# Altium PCB BLDC_DRV.PcbDoc
Units mil, origin at the board's own origin, x right, y up, seen from the top; angles counter-clockwise.
Board outline 4151.26 x 2211.23 mil, 2 copper layers (TOP, BOTTOM), stack 21 mil thick; 147 components, 93 nets, 524 pads, 184 vias.
Unrouted connection lines stored in the file: 67.
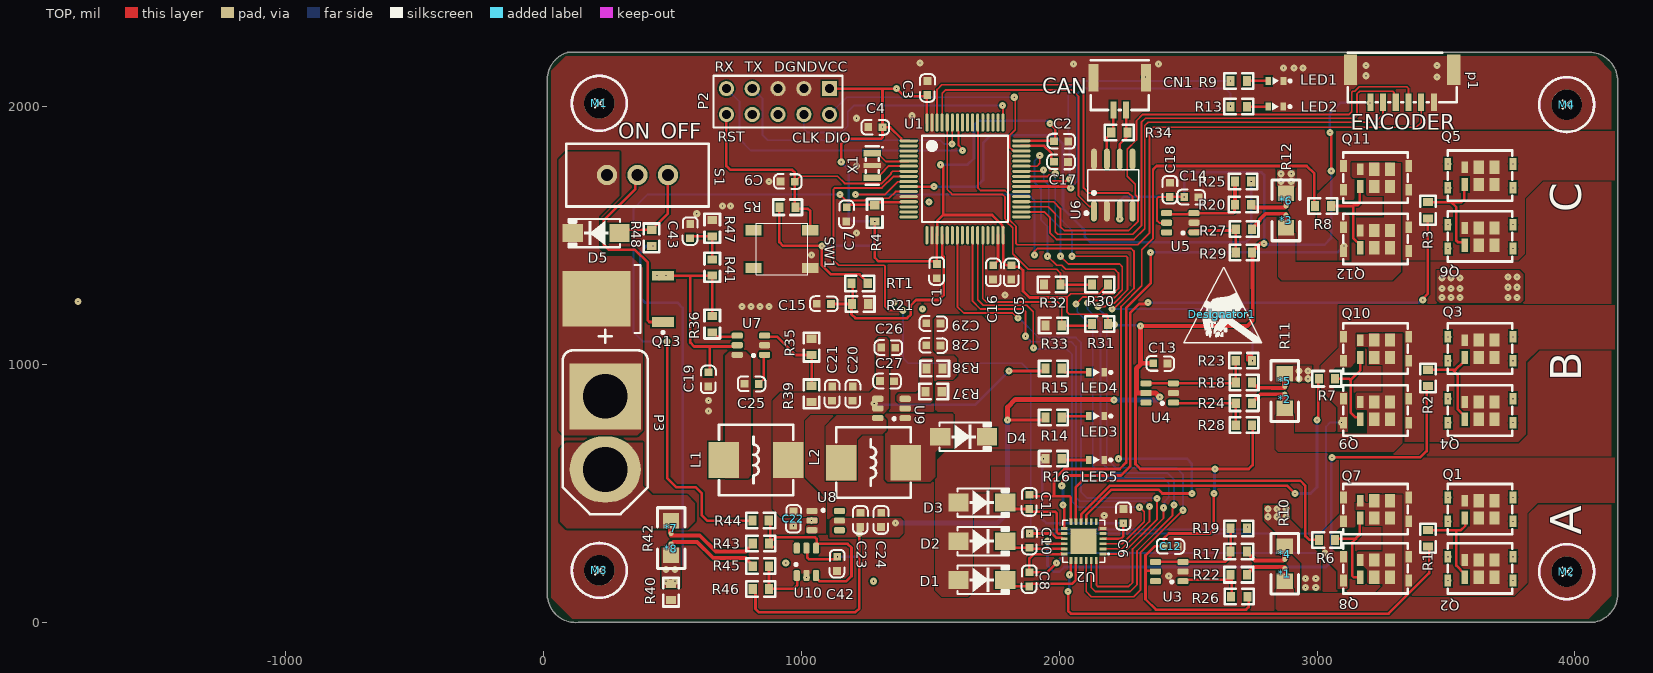
[diagram p0: TOP view]
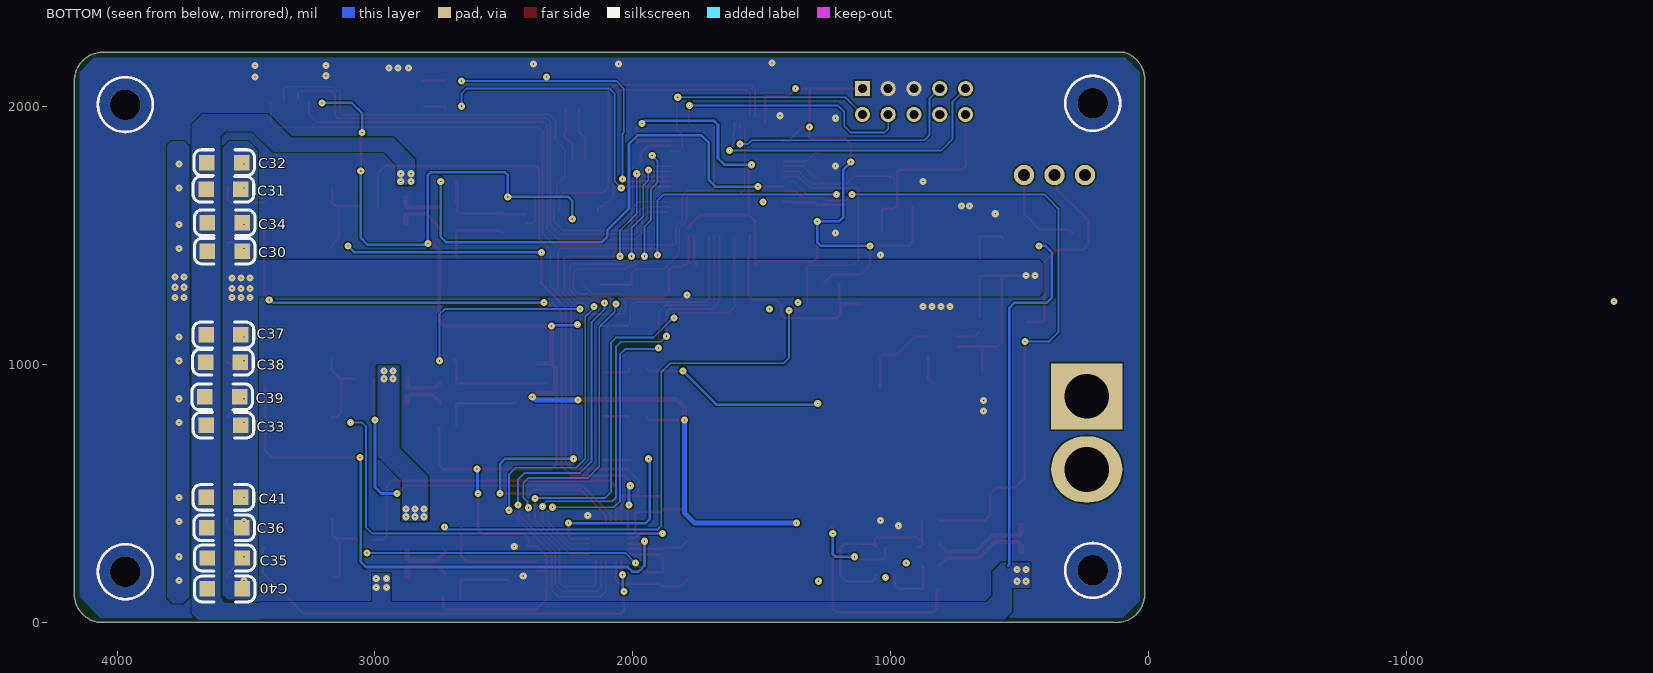
[diagram p1: BOTTOM view, seen from below]

## Layer stack, top to bottom
Top Solder: solder mask 0.4, Solder Resist, Dk 3.5
TOP: signal copper 1.4
Dielectric 2: prepreg 2.8, Composite dielectric, Dk 4.56
Dielectric 1: prepreg 12.6, Composite dielectric, Dk 4.56
Dielectric 3: prepreg 2.8, Composite dielectric, Dk 4.56
BOTTOM: signal copper 1.4
Bottom Solder: solder mask 0.4, Solder Resist, Dk 3.5

## Board outline
16.38,93.48 cw(c20,96.95) 14.98,96.95 14.98,2094.79 cw(c125.46,2104.06) 92.71,2209.98 cw(c94.88,2205.46) 94.88,2210.47 4045.72,2210.47 cw(c4055,2100) 4164.8,2115.3 cw(c4159.83,2114.61) 4164.85,2114.61 cw(c4159.83,2114.61) 4164.7,2113.39 cw(c4160.46,2110.71) 4165.47,2110.71 4165.47,119.28 cw(c4055,110) 4165.86,110 cw(c4055,110) 4078.88,1.74 cw(c4075.07,5) 4075.07,-0.01 135.21,-0.01 cw(c125.94,110.46)

## Design rules (kind name [scope] priority, off if disabled: settings)
Clearance [All] p1: gap=6 ignorepadtopadclearanceinfootprint=FALSE except(0: Arc-Hole Track-Hole SMDPad-SMDPad SMDPad-Hole THPad-Hole Via-Hole Fill-Hole Poly-Hole Region-Hole Text-Hole)
DiffPairsRouting DiffPair_DiffPairsRouting [InDifferentialPair ('NewDifferentialPair5')] p1: maxlimit=10 minlimit=10 mostfreqgap=10 toplayer_minwidth=7 toplayer_maxwidth=15 toplayer_prefwidth=15 bottomlayer_minwidth=7 bottomlayer_maxwidth=15 bottomlayer_prefwidth=15 maxuncoupledlength=500
DiffPairsRouting [All] p2: maxlimit=10 minlimit=10 mostfreqgap=10 toplayer_minwidth=15 toplayer_maxwidth=15 toplayer_prefwidth=15 bottomlayer_minwidth=15 bottomlayer_maxwidth=15 bottomlayer_prefwidth=15 maxuncoupledlength=500
MatchedLengths DiffPair_MatchedLengths [InDifferentialPair ('NewDifferentialPair5')] p1: tolerance=1000 checknetsindiffpair=FALSE checkdiffpairvsdiffpair=TRUE checkxsignals=TRUE checkothers=TRUE
MatchedLengths DiffPair_MatchedLengths_1 [InDifferentialPair ('NewDifferentialPair1')] p2: tolerance=1000 checknetsindiffpair=FALSE checkdiffpairvsdiffpair=TRUE checkxsignals=TRUE checkothers=TRUE
PlaneConnect PlaneConnect_1 [All] p1: planeconnectstyle=Relief reliefexpansion=20 reliefentries=4 reliefconductorwidth=10 reliefairgap=10
PlaneConnect [All] p2: planeconnectstyle=Relief reliefexpansion=20 reliefentries=4 reliefconductorwidth=10 reliefairgap=10
PolygonConnect [All] p1: connectstyle=Direct reliefconductorwidth=10 reliefentries=4 polygonreliefangle="90 Angle" airgapwidth=10
RoomDefinition BLDC_DRV [InComponentClass('BLDC_DRV')] p1: confinementstyle=ConfineIn formatcopy=TRUE lockcomponents=FALSE outline -1405,-1950 -560,-1950 -560,-1255 -1405,-1255
RoutingVias [All] p1: holewidth=12 width=24 viastyle="Through Hole" minholewidth=10 minwidth=20 maxholewidth=20 maxwidth=40
SolderMaskExpansion [All] p1: expansion=4 istentingtop=FALSE
Width [All] p1: maxlimit=10 minlimit=7 preferedwidth=10 minimp=50.000000 maximp=50.000000 favimp=50.000000
28 further rules are at their usual default settings.

## Components (designator, comment, footprint, x,y, rotation, side; value= is the part's Value field where it differs from the comment)
*1 "Com" Network_com 2875,209.37 r270 top
*2 "Com" Network_com 2875,885 r270 top
*3 "Com" Network_com 2880,1579.37 r270 top
*4 "Com" Network_com 2875,245 r90 top
*5 "Com" Network_com 2875,915.63 r90 top
*6 "Com" Network_com 2880,1615 r90 top
*7 "Com" Network_com 495,384.37 r270 top
*8 "Com" Network_com 495,265.63 r90 top
C1 "100nF" 0603C 1526.35,1390.21 r270 top
C2 "100nF" 0603C 2035.21,1864.65 r180 top
C3 "100nF" 0603C 1490.35,2100.21 r270 top
C4 "100nF" 0603C 1259.79,1921.35 r0 top
C5 "100nF" 0603C 1813.65,1329.79 r90 top
C6 "10uF 16V" 0603C 2250,440 r270 top
C7 "100nF" 0603C 1174.65,1554.79 r90 top
C8 "2.2uF 16V" 0603C 1885,195 r270 top
C9 "100nF" 0603C 975.21,1708.65 r180 top
C10 "2.2uF 16V" 0603C 1886.35,345.21 r270 top
C11 "2.2uF 16V" 0603C 1885,495 r270 top
C12 "100nf 6.3v" 0603C 2404.79,296.35 r0 top
C13 "100nf 6.3v" 0603C 2364.79,1005.35 r0 top
C14 "100nf 6.3v" 0603C 2484.79,1650.35 r0 top
C15 "2.2uf 6.3V" 0603C 1115.21,1234.65 r180 top
C16 "2.2uF" 0603C 1743.65,1329.79 r90 top
C17 "2.2uF" 0603C 2035,1785 r180 top
C18 "100nf 6.3v" 0603C 2430.35,1705.21 r270 top
C19 "2.2uf 100V" 0603C 638.65,914.79 r90 top
C20 "4.7uf 16V" 0603C 1198.65,859.79 r90 top
C21 "10uF 16V" 0603C 1118.65,859.79 r90 top
C22 "1uf 6.3v" 0603C 968.65,374.79 r90 top
C23 "1uf 6.3v" 0603C 1230.35,425.21 r270 top
C24 "100nf 6.3v" 0603C 1310.35,425.21 r270 top
C25 "100nf 50V" 0603C 779.79,926.35 r0 top
C26 "10uF/50V" 0603C 1365.21,1064.65 r180 top
C27 "100nf 16V" 0603C 1360.21,934.65 r180 top
C28 "10uF/50V" 0603C 1484.79,1075.35 r0 top
C29 "100nf 16V" 0603C 1484.79,1160.35 r0 top
C30 "4.7uF/50V" 1206C 3650,1440 r180 bottom
C31 "4.7uF/50V" 1206C 3655,1680 r180 bottom
C32 "4.7uF/50V" 1206C 3652.07,1783.18 r180 bottom
C33 "4.7uF/50V" 1206C 3655,765 r180 bottom
C34 "4.7uF/50V" 1206C 3650,1550 r180 bottom
C35 "4.7uF/50V" 1206C 3650,250 r180 bottom
C36 "4.7uF/50V" 1206C 3652.07,367.18 r180 bottom
C37 "4.7uF/50V" 1206C 3655,1115 r180 bottom
C38 "4.7uF/50V" 1206C 3657.07,1009.18 r180 bottom
C39 "4.7uF/50V" 1206C 3660,875 r180 bottom
C40 "4.7uF/50V" 1206C 3650,130 r180 bottom
C41 "4.7uF/50V" 1206C 3655,485 r180 bottom
C42 "100nf 6.3v" 0603C 1140.35,255.21 r270 top
C43 "100nf 6.3v" 0603C 570.35,1545.21 r270 top
CN1 "GH1.25-2P" GH1.25-WT-2P 2235,2050 r180 top
D1 "1N5819WS" SMA-L[DO-214AC] 1700,165 r0 top
D2 "1N5819WS" SMA-L[DO-214AC] 1700,315 r0 top
D3 "1N5819WS" SMA-L[DO-214AC] 1700,465 r0 top
D4 "1N5819WS" SMA-L[DO-214AC] 1630,720 r0 top
D5 "BZT52C16" SMA-L[DO-214AC] 204.45,1510 r180 top
Designator1 "Comment" ICO1 2630,1195 r0 top
L1 "4.7uH 3A" 0630L 705,630 r0 top
L2 "10UH" 0630L 1160,620 r0 top
LED1 "LED" LEDC1608(0603)-L 2840.47,2100 r180 top
LED2 "LED" LEDC1608(0603)-L 2840,2000 r180 top
LED3 "LED" LEDC1608(0603)-L 2145,800 r180 top
LED4 "LED" LEDC1608(0603)-L 2145,970 r180 top
LED5 "LED" LEDC1608(0603)-L 2145,630 r180 top
M1 "MountHole" M3-MountHole 216.85,2013.15 r0 top
M2 "MountHole" M3-MountHole 3968.15,196.85 r0 top
M3 "MountHole" M3-MountHole 216.85,201.85 r0 top
M4 "MountHole" M3-MountHole 3968.15,2008.15 r180 top
p1 "GH1.25-6p" GH1.25-WT-6P 3330,2080 r180 top
P2 "Header-D-F 2x5P" "Pin HDR2X5" 1110,2070 r180 top
P3 "XT60PB-M" XT60-M 240,735 r270 top
Q1 "IRF7480MTRPBF" TRS-SMD 3572.6,471.94 r0 top
Q2 "IRF7480MTRPBF" TRS-SMD 3572.6,242.21 r0 top
Q3 "IRF7480MTRPBF" TRS-SMD 3572.6,1094.73 r0 top
Q4 "IRF7480MTRPBF" TRS-SMD 3572.6,854.73 r0 top
Q5 "IRF7480MTRPBF" TRS-SMD 3572.6,1765 r0 top
Q6 "IRF7480MTRPBF" TRS-SMD 3572.6,1529.73 r0 top
Q7 "IRF7480MTRPBF" TRS-SMD 3167.6,471.94 r0 top
Q8 "IRF7480MTRPBF" TRS-SMD 3167.6,242.21 r0 top
Q9 "IRF7480MTRPBF" TRS-SMD 3167.6,854.73 r0 top
Q10 "IRF7480MTRPBF" TRS-SMD 3167.6,1094.73 r0 top
Q11 "IRF7480MTRPBF" TRS-SMD 3167.6,1757.21 r0 top
Q12 "IRF7480MTRPBF" TRS-SMD 3167.6,1520 r0 top
Q13 "HY19P03" TO-252AA 335,1255 r180 top
R1 "2.2R" 0603R 3430,295 r90 top
R2 "2.2R" 0603R 3430,917.01 r90 top
R3 "2.2R" 0603R 3430,1567.01 r90 top
R4 "0R" 0603R 1285,1555 r90 top
R5 "10K" 0603R 977.99,1610 r180 top
R6 "2.2R" 0603R 3007.01,320 r0 top
R7 "2.2R" 0603R 3007.01,945 r0 top
R8 "2.2R" 0603R 2992.01,1615 r0 top
R9 "1k" 0603R 2665,2100 r0 top
R10 "1mR" 1206R 2875,295 r270 top
R11 "1mR" 1206R 2875,965 r270 top
R12 "1mR" 1206R 2880,1665 r270 top
R13 "1k" 0603R 2665,2000 r0 top
R14 "10K" 0603R 1947.01,795 r0 top
R15 "10K" 0603R 1947.01,985 r0 top
R16 "10K" 0603R 1947.01,635 r0 top
R17 "1K" 0603R 2727.99,275 r180 top
R18 "1K" 0603R 2747.99,930 r180 top
R19 "30K" 0603R 2665,365 r0 top
R20 "1K" 0603R 2745,1620 r180 top
R21 "3.3k" 0603R 1197.01,1235 r0 top
R22 "510R" 0603R 2727.99,185 r180 top
R23 "30K" 0603R 2685,1015 r0 top
R24 "510R" 0603R 2747.99,850 r180 top
R25 "30K" 0603R 2682.01,1710 r0 top
R26 "30K" 0603R 2730,100 r180 top
R27 "510R" 0603R 2747.99,1525 r180 top
R28 "30K" 0603R 2747.99,765 r180 top
R29 "30K" 0603R 2747.99,1435 r180 top
R30 "1.5K" 0603R 2127.01,1310 r0 top
R31 "0R" 0603R 2127.01,1157.56 r0 top
R32 "0R" 0603R 1942.01,1310 r0 top
R33 "0R" 0603R 1947.01,1151.25 r0 top
R34 "120R" 0603R 2202.01,1900 r0 top
R35 "1K" 0603R 1040,1037.01 r90 top
R36 "100K" 0603R 655,1187.99 r270 top
R37 "100K" 0603R 1482.01,895 r0 top
R38 "5.1K" 0603R 1547.99,985 r180 top
R39 "5.36K" 0603R 1040,855 r90 top
R40 "0R" 0603R 495,87.01 r90 top
R41 "18k" 0603R 655,1407.99 r270 top
R42 "1mR" 1206R 495,260 r90 top
R43 "1K" 0603R 812.01,306.67 r0 top
R44 "30K" 0603R 874.01,395 r180 top
R45 "510R" 0603R 812.01,218.33 r0 top
R46 "30K" 0603R 812.01,130 r0 top
R47 "1k" 0603R 655,1560 r270 top
R48 "10K" 0603R 420,1460 r90 top
RT1 "33K" 0603R 1257.99,1315 r180 top
S1 "SS-12D10" SS-12D10 483.11,1735 r180 top
SW1 "TS-1187A-B-A-B" SMD-4X4X1.5 1034.76,1372.44 r180 top
U1 "STM32F405RGT6" LQFP_64 1635,1720 r0 top
U2 "FD6288Q_C328453" QFN-24 2170.1,265.79 r90 top
U3 "LMV321DBV" SOT-23-6_L2.9-W1.6-P0.95-LS2.8-BR 2426.85,197.4 r0 top
U4 "LMV321DBV" SOT-23-6_L2.9-W1.6-P0.95-LS2.8-BR 2390,890 r0 top
U5 "LMV321DBV" SOT-23-6_L2.9-W1.6-P0.95-LS2.8-BR 2470,1550 r0 top
U6 "MAX3051EKA+T" SOIC-8 2135,1587.3 r0 top
U7 "JW5026" SOT-23-6_L2.9-W1.6-P0.95-LS2.8-BR 805,1075 r0 top
U8 "SPX3819M5-L-3-3/TR" SOT-23-6_L2.9-W1.6-P0.95-LS2.8-BR 1095,395 r180 top
U9 "MT3608" SOT-23-6_L2.9-W1.6-P0.95-LS2.8-BR 1350,830 r0 top
U10 "LMV321DBV" SOT-23-6_L2.9-W1.6-P0.95-LS2.8-BR 1020,235 r270 top
X1 "8MHz" XTAL-3213-3P 1275,1772.2 r270 top

## Footprints (in the part's own frame and the unit in brackets; to place one, negate y for a bottom-side part, rotate by r counter-clockwise, add the part's x,y. Pads: shape width x height; smd on the part's side, far side on the other; paste and mask are expansions set on the pad)
0603C [mil]
  rect 30x30 smd: 1(0.21,-0.35) 2(55.21,-1.35)
  silkscreen extent -26,-30 81,28, body extent -1,-16 62,16, height 12
0603R [mm]
  rect 0.8x0.965 smd: 1(0,0) 2(1.6,0)
  silkscreen extent -0.64,-0.76 2.21,0.76, body extent -0.04,-0.41 1.56,0.41, height 0.45
0630L [mm]
  rect 3x3.5 smd: 1(-0.127,0) 2(6.223,0)
  silkscreen extent -0.61,-3.48 6.71,3.48, body extent -0.55,-3.05 6.4,3.55, height 3.05
1206C [mil]
  rect 60x60 smd: 1(0,0) 2(135,0)
  silkscreen extent -50,-50 185,50, body extent 2,-31 128,31, height 39
1206R [mil]
  rect 60x62.99 smd: 1(0,0) 2(135,0)
  silkscreen extent -50,-54 185,53, body extent 7,-31 133,31, height 24
GH1.25-WT-2P [mm] "GH1.25 2P 卧贴插座"
  rect 0.6x1.7 smd: 1(0.625,1.6) 2(-0.625,1.6)
  rect 1x2.7 smd: 3(2.575,-1.6) 4(-2.575,-1.6)
  silkscreen extent -2.88,-3.3 2.87,1.6, body extent -2.87,-2.86 2.87,2, height 4.26
GH1.25-WT-6P [mm] "GH1.25 6P 卧贴插座"
  rect 0.6x1.7 smd: 1(3.124,1.6) 2(1.874,1.6) 3(0.625,1.6) 4(-0.625,1.6) 5(-1.875,1.6) 6(-3.124,1.6)
  rect 1.3x3 smd: 7(5.074,-1.6) 8(-5.074,-1.6)
  silkscreen extent -5.37,-3.3 5.37,1.6, body extent -5.37,-2.86 5.37,2, height 4.26
ICO1 [mil]
  silkscreen extent -147,-112 156,183
LEDC1608(0603)-L [mm] "LED,Chip;1.60mm L X 0.80mm W X 0.80mm H"
  rect 0.55x0.8 smd: A(0.75,0) C(-0.75,0)
  silkscreen extent -1.53,-0.38 0.33,0.38, body extent -0.8,-0.4 0.8,0.42, height 0.64
LQFP_64 [mm] "LQFP_64_N"
  oval 1.8x0.3 smd: 1(-5.55,3.75) 2(-5.55,3.25) 3(-5.55,2.75) 4(-5.55,2.25) 5(-5.55,1.75) 6(-5.55,1.25) 7(-5.55,0.75) 8(-5.55,0.25) 9(-5.55,-0.25) 10(-5.55,-0.75) 11(-5.55,-1.25) 12(-5.55,-1.75) 13(-5.55,-2.25) 14(-5.55,-2.75) 15(-5.55,-3.25) 16(-5.55,-3.75) 33(5.55,-3.75) 34(5.55,-3.25) 35(5.55,-2.75) 36(5.55,-2.25) 37(5.55,-1.75) 38(5.55,-1.25) 39(5.55,-0.75) 40(5.55,-0.25) 41(5.55,0.25) 42(5.55,0.75) 43(5.55,1.25) 44(5.55,1.75) 45(5.55,2.25) 46(5.55,2.75) 47(5.55,3.25) 48(5.55,3.75)
  oval 0.3x1.8 smd: 17(-3.75,-5.55) 18(-3.25,-5.55) 19(-2.75,-5.55) 20(-2.25,-5.55) 21(-1.75,-5.55) 22(-1.25,-5.55) 23(-0.75,-5.55) 24(-0.25,-5.55) 25(0.25,-5.55) 26(0.75,-5.55) 27(1.25,-5.55) 28(1.75,-5.55) 29(2.25,-5.55) 30(2.75,-5.55) 31(3.25,-5.55) 32(3.75,-5.55) 49(3.75,5.55) 50(3.25,5.55) 51(2.75,5.55) 52(2.25,5.55) 53(1.75,5.55) 54(1.25,5.55) 55(0.75,5.55) 56(0.25,5.55) 57(-0.25,5.55) 58(-0.75,5.55) 59(-1.25,5.55) 60(-1.75,5.55) 61(-2.25,5.55) 62(-2.75,5.55) 63(-3.25,5.55) 64(-3.75,5.55)
  silkscreen extent -4.25,-4.25 4.25,4.25, body extent -5.99,-5.99 5.98,5.98, height 1.6
M3-MountHole [mm] "M3-MountHole"
  round 3 hole 3 unplated mask+0: 1(0,0)
  Keep-Out Layer circle w0.254: c0,0 r2.7
  silkscreen extent -2.7,-2.7 2.7,2.7
Network_com [mil]
  round 19.68 smd paste+0 mask+2: 1(0,0) 2(39.37,0)
  TOP region: 0,9.84 39.37,9.84 39.37,-9.85 0,-9.85 0,9.84
"Pin HDR2X5" [mm] "Connector; Header; 5x2 Position"
  rect 1.5x1.5 hole 0.9: 1(0,0)
  round 1.5 hole 0.9: 2(0,2.54) 3(2.54,0) 4(2.54,2.54) 5(5.08,0) 6(5.08,2.54) 7(7.62,0) 8(7.62,2.54) 9(10.16,0) 10(10.16,2.54)
  silkscreen extent -1.27,-1.27 11.43,3.81, body extent -1.27,-1.27 11.43,3.81, height 7.58
QFN-24 [mm]
  rect 0.28x0.665 smd paste-100 mask+0.05: 1(0,0) 2(0.5,0) 3(1,0) 4(1.5,0) 5(2,0) 6(2.5,0) 13(2.5,3.815) 14(2,3.815) 15(1.5,3.815) 16(1,3.815) 17(0.5,3.815) 18(0,3.815)
  rect 0.665x0.28 smd paste-100 mask+0.05: 7(3.157,0.658) 8(3.157,1.157) 9(3.157,1.658) 10(3.157,2.157) 11(3.157,2.658) 12(3.157,3.157) 19(-0.658,3.157) 20(-0.658,2.658) 21(-0.658,2.157) 22(-0.658,1.658) 23(-0.658,1.157) 24(-0.658,0.658)
  rect 2.55x2.55 smd paste-100 mask+0.05: 25(1.25,1.908)
  silkscreen extent -0.83,-0.62 3.33,3.98, body extent -0.89,-0.13 3.3,3.94, height 1
SMA-L[DO-214AC] [mm]
  rect 2x1.75 smd: A(-2.3,0) K(2.3,0)
  silkscreen extent -2.37,-1.4 2.7,1.4, body extent -2.9,-1.46 2.91,1.46, height 2.3
SMD-4X4X1.5 [mm]
  rect 1.6x1 smd: 1(-0.006,-0.065) 2(5.594,-0.065) 3(-0.006,-3.765) 4(5.594,-3.765)
  silkscreen extent 0.26,-4.44 5.32,0.64, body extent -0.53,-4.57 5.87,0.63, height 2.38
SOIC-8 [mil]
  oval 23.1x80.5 smd: 1(0,7.7) 2(50,7.7) 3(100,7.7) 4(150,7.7) 5(150,210) 6(100,210) 7(50,210) 8(0,210)
  silkscreen extent -35,-6 174,169, body extent -21,-13 171,223, height 67
SOT-23-6_L2.9-W1.6-P0.95-LS2.8-BR [mm]
  rrect50% 1.1x0.6 smd mask+0.051: 1(1.35,-0.95) 2(1.35,0) 3(1.35,0.95) 4(-1.35,0.95) 5(-1.35,0) 6(-1.35,-0.95)
  silkscreen extent 0.13,-1.14 0.38,-0.89, body extent -1.42,-1.46 1.42,1.46, height 1.07
SS-12D10 [mm]
  round 2 hole 1.2: 1(0,0) 2(3,0) 3(6,0)
  silkscreen extent -4,-3.1 10,3.1, body extent -3.95,-3.15 10.05,3.05, height 9.65
TO-252AA [mm]
  rect 6.7x5.5 smd: 1(3.275,0)
  rect 2.2x0.95 smd: 2(-3.275,2.28) 3(-3.275,-2.28)
  silkscreen extent -3.4,-3.35 -0.47,3.43, body extent -3.77,-3.27 6.16,3.27, height 2.39
TRS-SMD [mm]
  rect 0.65x1.15 smd: 1(0,0) 7(-1.65,0.325) 8(-1.65,-2.025) 9(4.76,-2.025) 10(4.76,0.325)
  rect 1x1.3 smd: 2(1.38,0) 3(2.93,0) 4(2.93,-1.7) 5(1.38,-1.7)
  rect 0.65x1.3 smd: 6(0,-1.7)
  silkscreen extent -1.67,-3.3 4.68,1.65, body extent -1.65,-3.37 4.7,1.59, height 0.25
XT60-M [mm] "长：16mm，宽：8.2mm，高：16mm"
  rect 6.5x7 hole 4.4: 1(-3.6,0)
  oval 6.5x7 hole 4.4: 2(3.6,0)
  silkscreen extent -10.16,-4.19 8,4.19, body extent -7.75,-4.1 8.15,4.05, height 16.5
XTAL-3213-3P [mil]
  rect 25.6x66.9 smd mask+2: 1(-47.2,0) 3(47.2,0)
  rect 19.7x66.9 smd mask+2: 2(0,0)
  silkscreen extent -75,-26 75,40, body extent -63,-26 63,26, height 32

## Part data
*1 *2 *3 *4 *5 *6 *7 *8: "网络连接"
C1 C2 C3 C4 C5 C7 C8 C9 C10 C11 C12 C13 C14 C15 C16 C17 C18 C20 C21 C22 C23 C24 C25 C27 C29 C42 C43: library part cap, "0603", Revision=V1.0
C6 C19 C26 C28: library part cap_1, "0805", Revision=V1.0
C30 C31 C32 C33 C34 C35 C36 C37 C38 C39 C40 C41: library part cap_2, "1206", Revision=V1.0
CN1: "CONN-SMD_2P-P1.25_GH1.25-2P"
D1 D2 D3 D4: "SOD-323_L1.7-W1.3-LS2.6-RD", Revision=V1.0
D5: "SOD-123_L2.7-W1.6-LS3.7-RD", Revision=V1.0
L1 L2: library part Ind-Power, "IND-SMD_L4.0-W4.0", DCR=.5m, Price(RMB)=0.000, Published=8-Jun-2000, Publisher="Altium Limited", Revision="July-2002: Re-released for DXP Platform."
LED1 LED2 LED3 LED4 LED5: "0603", Price(RMB)=0.00, Published=8-Jun-2000, Publisher="Altium Limited", Revision="July-2002: Re-released for DXP Platform."
M1 M2 M3 M4: "M3固定孔"
p1: "CONN-SMD_2P-P1.25_GH1.25-6P"
P2: "2*5pin", Revision=V1.0
P3: "CONN-TH_XT60PB-M"
Q1 Q2 Q3 Q4 Q5 Q6 Q7 Q8 Q9 Q10 Q11 Q12: "TRS-SMD_IRF7480MTRPBF"
Q13: library part HY19P03D, "TO-252-2_L6.6-W6.1-P4.57-LS9.9-TL-CW"
R1 R2 R3 R4 R5 R6 R7 R8 R9 R13 R14 R15 R16 R17 R18 R19 R20 R21 R22 R23 R24 R25 R26 R27 R28 R29 R30 R31 R32 R33 R34 R35 R36 R37 R38 R39 R40 R41 R43 R44 R45 R46 R47 R48 RT1: library part Res, "0603", Power=1/8W, Tolerance=±1%, Revision=V1.0
R10 R11 R12 R42: library part Res_1, "1206", Power=1/8W, Tolerance=±1%, Revision=V1.0
SW1: "SW-SMD_4P-L5.1-W5.1-P3.70-LS6.5-TL_H1.5"
U1: "ARM Cortex-M4 32-bit MCU+FPU, 210 DMIPS, 1024 kB Flash, 192 kB Internal RAM, 51 I/Os, 64-pin LQFP, -40 to 85 degC, Tray", I/Os (High Current)=51, Manufacturer=STMicroelectronics, Operating Frequency(F) (Processor speed) (MHz)=168, Supplier Part Number 1=497-11767-ND, Supply Voltage(Vcc) max (V)=3.6, Supply Voltage(Vcc) min (V)=1.8, ComponentLink1Description="Manufacturer URL", ComponentLink1URL=http://www.st.com/web/en/home.html, ComponentLink2Description=Datasheet, ComponentLink2URL=http://www.st.com/st-web-ui/static/active/en/resource/technical/document/datasheet/DM00037051.pdf, ComponentLink3Description="Package Specification", ComponentLink3URL=http://www.st.com/st-web-ui/static/active/en/resource/technical/document/datasheet/DM00037051.pdf, Core="ARM Cortex-M4", D/A Converter=2x12-bit, DatasheetVersion="Rev. 4", FLASH Size (Prog) (kB)=1024, Internal RAM Size (kB)=192, Mounting Technology="Surface Mount", PackageDescription="64-Pin Low Profile Quad Flat Package, 10 x 10 mm Body, 0.5 mm Pitch", PackageReference=LQFP64, PackageVersion="Rev. 4, 06/2013", Packing=Tray, PartNumber=STM32F405RGT6, Supplier 1=Digi-Key, Supplier 2=Farnell, Supplier 3=Newark, Supplier 4=Mouser, Supplier Part Number 2=2064363, Supplier Part Number 3=73T2329, Supplier Part Number 4=511-STM32F405RGT6
U2: "QFN-24_L4.0-W4.0-P0.50-BL-EP2.6"
U3 U4 U5 U10: "SOT-23-5_L3.0-W1.5-P0.95-LS2.8-BL", Symbol=CH217K
U6: "SOIC-8_L4.9-W3.9-P1.27-LS6.0-BL"
U7 U9: "SOT-23-6_L2.9-W1.6-P0.95-LS2.8-BR", Symbol=CH217K
U8: "SOT-23-5_L3.0-W1.7-P0.95-LS2.8-BR", Symbol=CH217K
X1: "OSC-SMD_3P-L3.2-W1.3-P1.20"

## Via types
v1: diameter 27.56, hole 0, TOP to BOTTOM, 183 vias
v2: diameter 27.56, hole 3.94, TOP to BOTTOM, 1 vias

## Nets (pads, with @x,y where several pads share a name; then routed paths per layer and width w, separated by ;. In a path a pad name is that pad's centre, name@x,y a point inside that pad or via, vN(x,y) a via of type N, cw(c..) or ccw(c..) an arc to the next point about the centre after c; other vN are vias at no path point)
5V: C20.1 C21.1 C22.2 C26.2 C27.2 L1.2 R15.1 R39.1 U8.1 U8.3 U9.4 U9.5 | length 718.7
  TOP w10: v1(1805,975) 1936.26,975 1945,983.74 R15.1@1945,985
  BOTTOM w10: v1@1285,845 1675,845 v1(1805,975)
  other v1: 1283.13,849.8
12: C6.2 C28.2 C29.2 D1.A D2.A D3.A D4.K R16.1 R37.2 U2.4 | length 698.5
  TOP w10: U2.4 2239.84,324.84 ; 2235,320 2239.84,324.84 ; C6.2 2248.65,333.65 2239.84,324.84
  BOTTOM w10: v1(1940,635) 1935,630 1935,400 1950,385 v1(2250,385)
BOOT0: R30.1 R32.2 U1.60 | length 1091.4
  TOP w7: U1.60@1566.1,1918.9 1566.1,1678.9 1585,1660 1780,1660 1790,1650 1790,1565.51 1795.57,1559.94 1795.57,1554.43 1820,1530 1820,1430 1880,1370 1990,1370 2005,1355 R32.2
  TOP w10: R32.2 R30.1
BOOT1: R31.1 R33.2 U1.28 | length 753.7
  TOP w7: U1.28 1703.9,1256.1 1717,1243 1992,1243 2010,1225 2010,1160 R33.2@2020,1150
  TOP w10: R33.2@2020,1150 2119.45,1150 R31.1
CAN1_RX: U1.62 U6.4 | length 1330.7
  TOP w7: U1.62@1526.73,1956.73 1526.73,2066.73 1545,2085 2070,2085 2095,2060 2095,1685 2115,1665 2270,1665 2285,1650 U6.4
CAN1_TX: U1.61 U6.1 | length 1110.6
  TOP w7: U1.61@1546.42,1961.42 1546.42,2051.42 1560,2065 2050,2065 2075,2040 2075,1655 2117.05,1612.95 2127.56,1612.95 2135,1605.51 U6.1
CAN_H: CN1.1 R34.1 U6.7 | length 198
  TOP w10: U6.7 2185,1879.74 2200.26,1895 R34.1@2205,1895 ; R34.1@2205,1900 2210.4,1905.4 CN1.1
CAN_L: CN1.2 R34.2 U6.6 | length 194.4
  TOP w10: U6.6 2235,1855 R34.2@2265,1885 ; CN1.2 2259.6,1900.4 R34.2@2265,1895
CH1_PA8_INHA: U1.41 U2.22 | length 2768.8
  TOP w7: U1.41 1954.84,1729.84 1961.07,1736.07 1988.93,1736.07 v1@1990,1735 ; v1(2050,1420) 2260,1420 2265,1415 2265,1290 2213.28,1238.28 2191.06,1238.28 2177.78,1225 v1@2145,1225 ; U2.22 2104.84,120.16 2125,100 2290,100 2315,125 2315,270 v1(2480,435)
  BOTTOM w7: v1(1985,1740) 1985,1585 2050,1520 v1(2050,1420) ; v1@2145,1225 2185,1185 2185,635 2220,600 2455,600 2480,575 v1(2480,435)
  other v1: 2150,1225
CH1N_PA7_INLA: U1.23 U2.1 | length 2048.1
  TOP w7: U1.23 1605.47,1224.53 1630,1200 1820,1200 v1(1840,1180) v1@1842.13,1177.87 ; U2.1 2245.79,265.79 2380,400 v1(2380,480)
  BOTTOM w7: v1(1840,1180) 1845,1180 1920,1105 2065,1105 2085,1085 2085,505 2107,483 2377,483 v1(2380,480)
CH2_PA9_INHB: U1.42 U2.23 | length 2664.9
  TOP w7: U1.42 1928.96,1749.53 1934.44,1755 v1(1940,1755) ; v1(2005,1420) 2035,1390 2235,1390 2245,1380 2245,1290 2215,1260 2176.77,1260 2165.77,1249 2141.08,1249 2134.28,1242.2 2113.48,1242.2 v1(2110,1238.72) ; U2.23 2124.53,135.47 2140,120 2275,120 2302,147 2302,277 2440,415 2440,440.62 2441.07,441.69 2441.07,451.4 v1@2440,452.47
  BOTTOM w7: v1(1940,1755) 1940,1715 1960,1695 1960,1575 2005,1530 v1(2005,1420) ; v1(2110,1238.72) 2110,1215 2160,1165 2160,625 2205,580 2420,580 2445,555 v1(2445,455)
CH2N_PB0_INLB: U1.26 U2.2 | length 1949.5
  TOP w7: U1.26 1664.53,1245.47 1695,1215 1860,1215 1870,1205 v1(1870,1110) ; U2.2 2243.91,285.47 2350,391.57 v1(2350,450)
  BOTTOM w7: v1(1870,1110) 1891.72,1088.28 2046.72,1088.28 2065,1070 2065,485 2080,470 2335,470 v1@2350,455
CH3_PA10_INHC: U1.43 U2.24 | length 2724.9
  TOP w7: U1.43 1914.21,1769.21 1925,1780 v1@1925,1800.5 ; v1(1955,1420) 1990,1385 2010,1385 2025,1370 2215,1370 2230,1355 2230,1295 2210,1275 2173.38,1275 2160.38,1262 2092,1262 2070,1240 v1@2065,1240 ; U2.24 2145,239.11 2145,144.1 2149.1,140 2270,140 2285,155 2285,285 2405,405 v1(2405,445)
  BOTTOM w7: v1(1925,1810) 1905,1790 1905,1705 1930,1680 1930,1560 1955,1535 v1(1955,1420) ; v1@2070,1230 2068.93,1228.93 2068.93,1225.5 2070,1224.44 2070,1205 2130,1145 2130,605 2175,560 2405,560 2425,540 2425,485 2408.93,468.93 2408.93,448.93 v1(2405,445)
  other v1: 2065,1235
CH3N_PB1_INLC: U1.27 U2.3 | length 1888.7
  TOP w7: U1.27 1684.21,1250.79 1705,1230 1875,1230 1900,1205 v1(1900,1065) ; U2.3 2245.16,305.16 2330,390 2330,430 v1@2315,445
  BOTTOM w7: v1@1895.92,1069.08 1905,1060 2030,1060 2050,1040 2050,470 2073.34,446.66 v1(2311.14,446.66)
DCBUS: C19.2 C30.2 C31.2 C32.2 C33.2 C34.2 C35.2 C36.2 C37.2 C38.2 C39.2 C40.2 C41.2 Q1.7 Q1.8 Q1.9 Q1.10 Q2.7 Q2.8 Q2.9 Q2.10 Q3.7 Q3.8 Q3.9 Q3.10 Q4.7 Q4.8 Q4.9 Q4.10 Q5.7 Q5.8 Q5.9 Q5.10 Q6.7 Q6.8 Q6.9 Q6.10 Q13.3 R36.1 R41.2 U7.5 | length 898.5
  TOP w10: Q13.3@449.14,1331.06 462.84,1344.76 Q13.3 464,1344.7 Q13.3@475,1344.7 ; Q13.3@480,1344.7 570,1344.7 654.7,1344.7 R41.2 R36.1@655,1185 ; 570,1345 570,1085 585,1070 645,1070 ; C19.2@645,974.42 645,1070 ; U7.5@740,1070 645,1070
  other v1: 3507.64,162.48 3760,162.48 3507.64,255 3760,255 3507.64,392.21 3760,392.21 3507.64,484.73 3760,484.73 3507.64,775 3760,775 3507.64,867.52 3760,867.52 3507.64,1015 3760,1015 3507.64,1107.52 3760,1107.52 3485,1260 3520,1260 3555,1260 3740,1260 3775,1260 3485,1295 3520,1295 3555,1295 3740,1300 3775,1300 3485,1335 3520,1335 3555,1335 3740,1340 3775,1340 440,1345 475,1345 3507.64,1450 3760,1450 3507.64,1542.52 3760,1542.52 3507.64,1685.27 3760,1685.27 3507.64,1777.79 3760,1777.79
DGND: C1.2 C2.1 C3.1 C4.1 C5.1 C6.1 C7.1 C9.2 C12.2 C13.2 C14.2 C15.2 C16.1 C17.1 C18.1 C19.1 C20.2 C21.2 C22.1 C23.1 C24.1 C26.1 C27.1 C28.1 C29.1 C42.2 C43.1 CN1.3 CN1.4 LED1.C LED2.C LED3.C LED4.C LED5.C M1.1 M2.1 M3.1 M4.1 p1.6 p1.7 p1.8 P2.3 P2.5 R21.2 R32.1 R33.1 R35.2 R38.1 R40.1 R47.1 SW1.1 U1.12 U1.18 U1.63 U2.6 U3.2 U4.2 U5.2 U6.2 U6.8 U7.2 U8.2 U9.2 U10.2 X1.2
  other v1: 2425,180 2460,295 970,375 1040,395 2175,415 640,820 640,860 770,1225 805,1225 840,1225 875,1225 1790,1270 1040,1425 1215,1510 595,1585 695,1615 725,1615 875,1710 1215,1770 1215,1955 1430,1965 3465,2115 3190,2120 2870,2150 2910,2150 2945,2150 3190,2160 3465,2160 2055,2165 2385,2165 1460,2170
ENC_SPI2_CLK: p1.2 U1.34 | length 1950.2
  TOP w7: U1.34@1867.05,1592.05 1942.95,1592.05 1965,1570 1965,1510 1990,1485 2290,1485 2332.05,1527.05 2332.05,1927.05 2345,1940 3225,1940 3256.22,1971.22 p1.2
ENC_SPI2_CS: p1.5 U1.54 | length 2647.4
  TOP w7: U1.54@1685,1921.17 1685,1685 1695,1675 1790,1675 1808.57,1656.43 1808.57,1559.81 1833,1535.38 1833,1469.1 1837.1,1465 2305,1465 2350,1510 2350,1905 2365,1920 3385,1920 3403.81,1938.81 p1.5
ENC_SPI2_MISO: p1.3 U1.35 | length 2076.7
  TOP w7: U1.35 1958.27,1611.73 1985,1585 1985,1515 1995,1505 2285,1505 2319.05,1539.05 2319.05,1939.05 2335,1955 3145,1955 3155,1965 3155,2050 3165,2060 3294.07,2060 3298.17,2055.9 3298.17,2031.83 p1.3@3303.13,2026.87
ENC_SPI2_MOSI: p1.4 U1.36 | length 2173
  TOP w7: U1.36@1866.42,1631.42 1978.58,1631.42 2005,1605 2005,1535 2020,1520 2270,1520 2306.05,1556.05 2306.05,1647.33 2295,1658.38 2295,1700 2263.95,1731.05 2263.95,1834.72 2300,1870.77 2300,1945 2325,1970 3125,1970 3135,1980 3135,2055.9 3139.1,2060 3146.62,2060 3163.72,2077.1 3347.9,2077.1 3354.62,2070.38 p1.4
GHA: R1.1 U2.19 | length 1779.7
  TOP w10: v1(2035,120) 2035,45 2046,34 3277.51,34 3435,191.49 3435,285 R1.1@3430,290 ; v1@2040,175 2045.79,180.79 U2.19
  BOTTOM w10: v1(2035,120) 2040,125 v1(2040,185)
GHB: R2.1 U2.16 | length 2326.9
  TOP w10: v1(1955,315) 1964.84,305.16 U2.16 ; v1(3058.28,640) 3400,640 3425,665 3425,912.01 R2.1
  BOTTOM w10: v1(1955,315) 1955,220 1978.36,196.64 2001.64,196.64 2020,215 3034.73,215 3055,235.27 3055,636.72 v1(3058.28,640)
GHC: R3.1 U2.13 | length 2524.6
  TOP w10: v1(2010,530) 2012.85,532.85 2012.85,547.85 2035,570 2240,570 2275.5,605.5 2275.5,1200.5 2310,1235 v1@2345,1235 ; U2.13 2019.9,444.9 v1@2020,445 ; v1@3410,1255 3430,1275 R3.1
  BOTTOM w10: v1(2015,455) v1@2015,530 ; v1(2345,1240) 3395,1240 v1@3405,1250
  other v1: 3410,1250
GLA: R6.1 U2.11 | length 1296.9
  TOP w10: U2.11@2065,390 2065,525 2090,550 2935,550 2955,530 2955,335 2970,320 R6.1
GLB: R7.1 U2.10 | length 1428.1
  TOP w10: U2.10 2085,390.26 2085,418.56 2197.22,530.78 2884.22,530.78 v1(2915,500) ; v1(3000,785) 3000,789.75 3005,794.75 R7.1@3005,942.91
  BOTTOM w10: v1@2920,500 2975,500 3000,525 v1(3000,785)
GLC: R8.1 U2.9 | length 2835.3
  TOP w7: v1@2240,637.68 2240,1225 2320,1305 2320,1445 2364.5,1489.5 2364.5,1756.55
  TOP w10: U2.9 2104.84,415.77 2203.85,514.78 2385.26,514.78 2400.04,500 v1(2515,500) ; 2364.5,1756.55 2377.95,1770 2960,1770 2990,1740 R8.1@2990,1609.88
  BOTTOM w10: v1(2230,635) 2495,635 2515,615 v1(2515,500)
ISENS: R44.2 U1.11 | length 2700.5
  TOP w7: v1(1150,1660) 1173.28,1636.72 1246.72,1636.72 1255,1645 1340,1645 1365.79,1670.79 1409.21,1670.79 U1.11@1410,1670
  TOP w10: v1(480,1090) 480,560 515,525 590,525 615,500 615,415 635,395 R44.2
  BOTTOM w7: v1(480,1090) 385,1090 350,1125 350,1605 390,1645 405,1660 v1@1140,1660
ISENSA: R19.2 U1.8 | length 3175.3
  TOP w7: v1(1395,1210) 1340,1210 1325,1225 1325,1380.9 1320.9,1385 1145,1385 1125,1405 1125,1680 1129.88,1684.88 1312.95,1684.88 1357.91,1729.84 U1.8
  BOTTOM w7: v1(1395,1210) 1395,1025 1415,1005 1855,1005 1890,970 1890,375 1905,360 2725,360 v1@2730,365
  other v1: 2730,370
ISENSB: R23.2 U1.9 | length 2592.3
  TOP w7: v1(1210,1660) 1325,1660 1374.24,1709.24 1394.24,1709.24 U1.9@1395,1710 ; v1@1905,1430 1905,1440 1915,1450 2280,1450 2290,1440 2290,1295 2210,1215 v1(2205,1215) ; R23.2 2747.99,1037.5 2730.79,1037.5 2728.74,1035.45 2728.74,1015 v1(2750,1015)
  BOTTOM w7: 1225,1660 1575,1660 ; 1572.74,1660 1880,1660 1905,1635 v1(1905,1425) ; v1(2205,1215) 2730,1215 2750,1195 v1(2750,1015)
ISENSC: R25.2 U1.10 | length 2052.8
  TOP w10: U1.10 1416.73,1690.24 1514.76,1690.24 v1(1515,1690)
  BOTTOM w10: v1(1515,1690) 1680,1690 1705,1715 1705,1860 1735,1890 1980,1890 2015,1855 2015,1605 2100,1520 2100,1495 2120,1475 2725,1475 2745,1495 v1(2745,1710)
JTCK_SWCLK: P2.4 U1.49 | length 973.7
  TOP w7: v1@1775,2005 1782.64,1997.36 U1.49
  BOTTOM w7: P2.4@1005,1965 1010,1960 1010,1915 1025,1900 1155,1900 1180,1925 1180,1980 1205,2005 v1(1780,2005)
JTMS_SWDIO: P2.2 U1.46 | length 997.2
  TOP w7: v1@1825,2040 1830,2035 1830,1910 1808.57,1888.57 1808.57,1841.57 1817.6,1832.55 1818.4,1832.55 1822.67,1828.27 U1.46
  BOTTOM w7: P2.2@1121.31,1971.63 1121.31,1981.31 1176.53,2036.53 v1(1826.09,2036.53)
LED0: R13.1 U1.39 | length 1231.9
  TOP w10: U1.39@1855.47,1690.47 v1@2045.47,1690.47
  BOTTOM w7: v1(2045,1685) 2070,1710 2070,2050 2090,2070 2645,2070 2664.39,2050.61 v1(2664.39,2001.63) 2664.39,1995.61 v1@2665,1995
LED1: R9.1 U1.40 | length 1199.1
  TOP w10: U1.40 2025.19,1710.16 2035.03,1720 v1(2039.78,1720) ; R9.1@2654.25,2086 2655,2086.75 R9.1@2655,2100
  BOTTOM w7: v1(2039.78,1720) 2039.78,1895.39 2035,1900.17 2035,2070 2065,2100 v1(2665,2100)
Net*1_2: *1.2 Q7.1 Q7.2 Q7.3 Q7.4 Q7.5 Q8.1 Q8.2 Q8.3 Q8.4 Q8.5 R10.2
Net*2_2: *2.2 Q9.1 Q9.2 Q9.3 Q9.4 Q9.5 Q10.1 Q10.2 Q10.3 Q10.4 Q10.5 R11.2
Net*3_2: *3.2 Q11.1 Q11.2 Q11.3 Q11.4 Q11.5 Q12.1 Q12.2 Q12.3 Q12.4 Q12.5 R12.2
Net*7_1: *7.1 P3.2 R42.2
Net*7_2: *7.2 R43.1 | length 368.2
  TOP w15: *7.2 495,337.5 606.61,337.5 669.11,275 785,275 785,276.41 812.01,303.42 R43.1 ; R43.1@810,310 R43.1@810,311.92
Net*8_2: *8.2 R45.1 | length 370.4
  TOP w15: *8.2 496.27,305 503.77,312.5 596.25,312.5 658.75,250 785,250 785,248.59 R45.1@810,223.59 ; R45.1@810,215 R45.1@810,223.59 ; R45.1 812.01,221.58 R45.1@810,223.59
NetC7_2: C7.2 R4.2 U1.13 | length 236.6
  TOP w10: C7.2@1176,1620 R4.2@1272.01,1620 ; R4.2@1282.5,1620.5 R4.2 1295.75,1628.74 1303.59,1628.74 1304.85,1630 1385.06,1630 1386.48,1631.42 U1.13
NetC16_2: C16.2 U1.31 | length 119.8
  TOP w10: C16.2@1755,1385 1755,1395 1762.95,1402.95 U1.31
NetC17_2: C17.2 U1.47 | length 170.1
  TOP w10: U1.47 1942.05,1847.95 1969.79,1820.21 1969.79,1785.21 C17.2@1975,1780
NetC25_1: C25.1 L1.1 U7.6
NetC25_2: C25.2 U7.1 | length 113.3
  TOP w10: C25.2 855,945 U7.1@855,1030
NetD4_A: D4.A L2.2 U9.1
NetD5_A: D5.A R48.2 S1.1 | length 370.4
  TOP w10: D5.A 307.99,1522.99 R48.2 423.25,1522.99 434,1533.74 434,1536.99 483.11,1586.1 S1.1
NetD5_K: D5.K P3.1 Q13.1 S1.3
NetL2_1: L2.1 U9.6
NetLED1_A: LED1.A R9.2 | length 87
  TOP w10: R9.2 LED1.A LED1.A@2815,2100
NetLED2_A: LED2.A R13.2 | length 87.5
  TOP w10: R13.2@2725,1995 2730,2000 LED2.A
NetLED3_A: LED3.A R14.2 | length 102.5
  TOP w10: R14.2@2015,795 2020,800 LED3.A
NetLED4_A: LED4.A R15.2 | length 111.5
  TOP w10: R15.2@2015,985 2015,976.75 2021.75,970 LED4.A
NetLED5_A: LED5.A R16.2 | length 105.5
  TOP w10: R16.2@2010,630 LED5.A
NetQ1_6: Q1.6 Q2.6 R1.2 | length 370.3
  TOP w10: R1.2 3557.99,357.99 3575,375 Q1.6@3575,400 ; 3540,355 3540,220.66 3572.6,188.07 Q2.6
NetQ3_6: Q3.6 Q4.6 R2.2 | length 356.1
  TOP w10: R2.2 3525,980 ; Q4.6@3570,800 3570,803.18 3545,828.18 3545,960 3525,980 ; Q3.6@3575,1010 3567.6,1010 3537.6,980 3525,980
NetQ5_6: Q5.6 Q6.6 R3.2 | length 396.7
  TOP w10: R3.2 3520,1630 ; Q6.6@3570,1460 3570,1469.8 3564.8,1475 3545.86,1475 3540,1480.86 3540,1610 3520,1630 ; Q5.6@3570,1690 3570.86,1689.14 3570.86,1640.86 3560,1630 3520,1630
NetQ7_6: Q7.6 Q8.6 R6.2 | length 348.1
  TOP w10: R6.2 3075,325 3151.58,325 3136.58,310 3136.58,180.86 3142.43,175 Q8.6@3165,175 ; 3150,325 3165,340 3165,395 Q7.6@3170,400
NetQ9_6: Q9.6 Q10.6 R7.2 | length 340.8
  TOP w10: R7.2 3124.74,945 3130.6,939.14 3130.6,814.4 3150,795 3165,795 Q9.6@3170,790 ; 3129.87,939.87 3167.6,977.6 Q10.6
NetQ11_6: Q11.6 Q12.6 R8.2 | length 347.8
  TOP w10: R8.2 3060,1615 3140,1615 ; Q11.6@3165.86,1684.14 3165.86,1625.86 3157.99,1617.99 3140,1617.99 3140,1615 ; Q12.6@3170,1455 3170,1460.72 3140,1490.72 3140,1615
NetQ13_2: Q13.2 S1.2 | length 813.1
  TOP w10: S1.2 356.55,1726.55 356.55,1681.55 235,1560 235,1465 255,1445 355,1445 405,1395 405,1171.09 410.86,1165.24 Q13.2@468.94,1165.24
NetR17_2: R17.2 R19.1 U3.3 U3.4 | length 395.5
  TOP w10: U3.4@2370,235 2370.2,234.8 U3.4 U3.3 2643.05,234.8 2663.25,255 2665,255 ; R19.1@2662.99,365 R19.1@2667.99,370 ; R17.2@2665,260 2665,345
NetR18_2: R18.2 R23.1 U4.3 U4.4 | length 441.2
  TOP w10: U4.4 2442.6,927.4 U4.3@2445,925 ; U4.3 2677.4,927.4 R18.2@2680,930 ; R18.2 2685,1010 R23.1@2695,1020
NetR20_2: R20.2 R25.1 U5.3 U5.4 | length 655.7
  TOP w10: U5.4@2416.85,1582.4 U5.3@2523.15,1582.4 ; U5.3@2503.15,1582.4 U5.3@2523.15,1582.4 ; U5.3@2503.15,1587.4 U5.3@2517.6,1587.4 ; U5.3@2517.6,1582.4 U5.3@2523.15,1582.4 ; U5.3@2520,1585 U5.3@2517.6,1587.4 ; U5.3 2674.25,1587.4 ; 2680,1590 2680,1630 R25.1@2680,1697.01 ; 2680,1595 2680,1593.15 2674.25,1587.4 ; R25.1 2685,1707.01 2685,1697.01 R20.2@2685,1630 ; U5.3@2517.6,1587.4 2674.25,1587.4
NetR22_2: R22.2 R26.2 U3.1 | length 264.1
  TOP w10: U3.1 2485,165 2665,165 ; R22.2@2665,170 2670,165 R26.2@2670,95
NetR24_2: R24.2 R28.2 U4.1 | length 317.2
  TOP w10: U4.1@2455,855 2455,854.74 2459.74,850 R24.2 R28.2
NetR27_2: R27.2 R29.2 U5.1 | length 285.9
  TOP w10: U5.1@2503.15,1512.6 U5.1@2509.4,1518.85 ; U5.1@2505.73,1515.18 U5.1@2509.4,1518.85 ; R27.2@2682.4,1512.6 2685,1510 R29.2@2685,1420 ; R27.2 2680,1520 2525.66,1520 2524.52,1518.85 U5.1@2509.4,1518.85
NetR35_1: R35.1 R39.2 U7.3 | length 337.2
  TOP w10: U7.3@857.4,1107.4 907.6,1107.4 977.99,1037.01 R35.1 R39.2 R39.2@1040,915 ; U7.3@860,1110 U7.3@862.4,1112.4
NetR36_2: R36.2 U7.4 | length 95.2
  TOP w10: R36.2@660,1125 660,1123.25 675.85,1107.4 U7.4@746.85,1107.4
NetR37_1: R37.1 R38.2 U9.3
NetR43_2: R43.2 R44.1 U10.3 U10.4 | length 734.9
  TOP w10: R44.1@880,390 R43.2@880,314.91 ; R43.2@889,292.67 885.75,292.67 875,303.42 R43.2 875,309.91 R43.2@880,314.91 ; U10.4@1055,295 U10.4@1057.4,297.4 ; U10.3 1057.4,172.5 1069.9,160 1175,160 1195,180 1195,290 1180,305 U10.4@1065,305 ; U10.4@1060,295 1060,305 1060,324.14 1054.14,330 898.33,330 889,320.66 885.75,320.66 R43.2@880,314.91
NetR45_2: R45.2 R46.2 U10.1 | length 248.3
  TOP w10: R45.2@880,220 875,215 R46.2 970,130 985,145 U10.1@985,185
OS_8M_IN: U1.5 X1.1 | length 155.2
  TOP w7: X1.1 1295.65,1819.4 1327.49,1787.56 1382.22,1787.56 1382.65,1787.98 1415.58,1787.98 U1.5
OS_8M_OUT: U1.6 X1.3 | length 161.6
  TOP w7: X1.3 1295.65,1725 1322.48,1751.83 1322.48,1753.03 1340,1770.56 1382.22,1770.56 1382.65,1770.13 1415.58,1770.13 U1.6
PGND: *4.2 *5.2 *6.2 *8.1 C30.1 C31.1 C32.1 C33.1 C34.1 C35.1 C36.1 C37.1 C38.1 C39.1 C40.1 C41.1 R10.1 R11.1 R12.1 R40.2 R42.1 R48.1 | length 1419
  BOTTOM w10: v1(425,1460) 400,1460 375,1435 375,1260 395,1240 520,1240 540,1220 540,225 545,220
  other v1: 2955,135 2995,135 475,160 510,160 2955,170 2995,170 1020,175 475,205 510,205 2810,410 2845,410 2880,410 2810,440 2845,440 2880,440 2930,945 2965,945 2930,975 2965,975 2860,1710 2900,1710 2860,1740 2900,1740
RST: C9.1 P2.10 R5.1 SW1.3 U1.7 | length 1223.1
  TOP w7: C9.1@985,1699 986.5,1700.5 986.5,1720.5 996.4,1730.4 1140.54,1730.4 1168.24,1702.7 1312.39,1702.7 1347.84,1738.16 1347.84,1742.84 1354.53,1749.53 U1.7
  TOP w10: P2.10@705,1960 710,1955 710,1770 725,1755 965,1755 975,1745 C9.1 R5.1@975,1615 ; R5.1@980.74,1612.75 988.74,1604.74 1025,1604.74 1035,1594.74 SW1.3
SHA: C8.1 Q1.1 Q1.2 Q1.3 Q1.4 Q1.5 Q2.1 Q2.2 Q2.3 Q2.4 Q2.5 Q7.7 Q7.8 Q7.9 Q7.10 Q8.7 Q8.8 Q8.9 Q8.10 U2.18 | length 1363.7
  TOP w10: v1(1990,230) 1954.79,194.79 C8.1 1884.65,248.65 1900,264 2005.04,264 U2.18@2009.58,268.53
  BOTTOM w7: v1(1990,230) 2029.84,269.84 v1(3030.22,269.84)
SHB: C10.1 Q3.1 Q3.2 Q3.3 Q3.4 Q3.5 Q4.1 Q4.2 Q4.3 Q4.4 Q4.5 Q9.7 Q9.8 Q9.9 Q9.10 Q10.7 Q10.8 Q10.9 Q10.10 U2.15 | length 1758.8
  TOP w10: C10.1 1972.76,345 1989.74,328.02 2009.14,328.02 2012.32,324.84 U2.15
  BOTTOM w7: v1(1885,345) 3010,345 3035,370 3035,760 3050,775 v1(3095,775)
SHC: C11.1 Q5.1 Q5.2 Q5.3 Q5.4 Q5.5 Q6.1 Q6.2 Q6.3 Q6.4 Q6.5 Q11.7 Q11.8 Q11.9 Q11.10 Q12.7 Q12.8 Q12.9 Q12.10 U2.12 | length 2240.8
  TOP w10: C11.1@1890,494.65 1894.65,490 1980,490 ; U2.12 2045.79,484.14 2039.93,490 1980,490 ; v1(2355,1435) 2355,1315 2259.5,1219.5 2259.5,619.5 2235,595 2020,595 1980,555 1980,490
  BOTTOM w10: v1(2355,1435) 3080,1435 v1(3105,1460)
SNA: *4.1 R17.1 | length 165.7
  TOP w15: R17.1 2727.99,271.75 2760.06,239.68 2868.42,239.68 2873.74,245 *4.1
SNB: *5.1 R18.1 | length 143.1
  TOP w15: R18.1 2747.99,926.75 2756.24,918.5 2759.49,918.5 2767.99,910 2825.24,910 2825.47,909.77 2875,909.77 *5.1
SNC: *6.1 R20.1 | length 142.7
  TOP w15: R20.1 2745,1617.93 2753.25,1609.68 2873.42,1609.68 2878.74,1615 *6.1
SPA: *1.1 R22.1 | length 166.5
  TOP w15: R22.1 2727.99,188.25 2754.43,214.68 2874.93,214.68 2875,214.62 *1.1
SPB: *2.1 R24.1 | length 145.7
  TOP w15: R24.1 2747.99,853.25 2779.74,885 2814.89,885 2815.11,884.77 2868.33,884.77 2873.73,879.37 *2.1@2875,879.37
SPC: *3.1 R27.1 | length 166.5
  TOP w15: R27.1 2747.99,1528.25 2778.12,1558.38 2778.12,1562.8 2800,1584.68 2879.93,1584.68 2880,1584.62 *3.1
TEMP: C15.1 R21.1 RT1.2 U1.20 | length 846.6
  TOP w10: C15.1 R21.1@1195,1235 ; R21.1@1195,1225 1195,1195 1210,1180 1410,1180 1425,1195 1425,1230 1445.26,1250.26 1533.24,1250.26 1552,1269.02 1552,1418 1546.42,1423.58 U1.20 ; R21.1 1200,1237.99 RT1.2@1200,1315
USART1_RX: P2.9 U1.58 | length 1210.9
  TOP w7: U1.58 1605.47,1907.67 1610,1903.15 1610,1850 v1@1625,1835
  BOTTOM w7: P2.9 760,2020 760,1875 805,1830 v1(1625,1830)
USART1_TX: P2.7 U1.59 | length 1029.7
  TOP w7: v1@1585.39,1855 1585.39,1938.11 U1.59
  BOTTOM w7: P2.7 850,2030 850,1890 870,1870 1538.75,1870 1553.75,1855 v1(1585,1855)
VBA: C8.2 D1.K U2.20 | length 366.6
  TOP w10: D1.K 1815.55,140 C8.2@1885,140 ; C8.2 1893.65,149.79 1899.29,149.79 1899.5,150 2050,150 2065,165 U2.20@2065,235
VBB: C10.2 D2.K U2.17 | length 239.9
  TOP w10: D2.K 1815.55,290 C10.2@1880,290 ; C10.2@1880,285 1880.47,285.47 U2.17
VBC: C11.2 D3.K U2.14 | length 294.2
  TOP w10: D3.K@1805,440 1883.43,440 C11.2 ; C11.2@1885,435 1890.21,429.79 1984.14,429.79 1990,423.93 1990,350.39 1995.86,344.53 U2.14
VBUS: C43.2 R41.1 R47.2 | length 179.9
  TOP w10: C43.2@565,1490 572.01,1497.01 R47.2 R41.1@655,1410
VCC: C1.1 C2.2 C3.2 C4.2 C5.2 C12.1 C13.1 C14.1 C18.2 C23.2 C24.2 C42.1 p1.1 P2.1 R4.1 R5.2 R14.1 R26.1 R28.1 R29.1 R30.2 R31.2 R46.1 RT1.1 U1.1 U1.19 U1.32 U1.48 U1.64 U3.5 U4.5 U5.5 U6.3 U8.5 U10.5 | length 13292.6
  TOP w7: C5.2@1805,1390 1810,1385 C5.2@1815,1380 ; R31.2@2190,1160 2190,1190 2185,1195 2040,1195 2030,1205 2030,1260 2045,1275 2155,1275 2174.5,1294.5 2177.75,1294.5 2190,1306.75 R30.2 ; U5.5@2415,1545 2410.86,1549.14 2387.86,1549.14 2380,1557.01 2380,1645 2385,1650 C18.2
  TOP w10: R46.1 822.76,119.25 822.76,52.24 835,40 1210,40 1225,55 v1(1225,345) 1225,365 C23.2@1230,370 ; R5.2 915,1475 930,1460 v1(1080,1460) 1080,1385 1115,1350 1226.24,1350 1257.99,1318.25 RT1.1 ; U10.5 1023.5,284.65 1023.5,251.5 1030,245 C42.1@1140,245 ; P2.1@1115,2070 1315,2070 ; v1(1155,1785) 1155,1855 1175,1875 1309.14,1875 1315,1880.86 C4.2 1315,2070 ; v1(1285,1555) 1285,1415 1300,1400 1525,1400 C1.1@1526,1399 ; C4.2@1315.52,1920 1345,1920 1387.38,1877.62 1387.38,1868.47 1388.22,1867.64 U1.1 ; U1.64 1487.36,2037.36 1490,2040 1400,2040 v1(1370,2070) 1315,2070 ; C1.1 C1.1@1526,1395 ; U1.19@1526,1505 C1.1@1526,1399 ; U1.19 1526.73,1556.73 1550,1580 ; C1.1@1530,1395 C1.1@1526,1399 ; v1@1545,1775 1550,1770 1550,1580 ; U1.32 1782.64,1397.36 1795,1385 C5.2@1810,1385 ; U1.32@1785,1530 1779.86,1535.14 1779.86,1540.14 1740,1580 1550,1580 ; v1(1800,785) 1937.01,785 R14.1 ; C5.2@1815,1380 1845,1380 1860,1365 1860,1285 1885,1260 2030,1260 ; U1.48 1977.36,1867.64 C2.2@1980,1865 ; v1(1965,1935) 1965,1934.3 1985,1914.3 1985,1865 C2.2@1980,1860 ; 2301.86,890 2300,891.86 2296,895.86 2296,614 2315,595 2596.89,595 v1@2600,591.89 ; U3.5 2371.1,200 2340,200 2335,205 ; v1@2383.52,879.99 v1@2389.99,879.99 ; C18.2 C14.1@2475,1650 ; v1@2600,505 v1(2600,500) 2600,360 2585,345 2425,345 2405,325 C12.1 2404,295 2370,295 2335,260 2335,205 ; v1(2605,595) 2735,595 2750,610 2750,751 2754,755 R28.1@2755,755 ; R26.1@2735,95 2735,60 2725,50 2375,50 2335,90 2335,205 ; R29.1 R29.1@2747.99,1438.25 ; 2750,1296.36 2750.86,1295.5 ; 2779.74,1470 v1(2795,1470) ; v1@3050,1905 3055,1900 v1(3055,1750)
  TOP w15: v1(2315,1150) 2730,1150 2750.86,1170.86 2750.86,1295.5 ; R29.1@2747.99,1438.25 2779.74,1470 ; 2750,1296.36 R29.1@2750,1430
  TOP w19: v1(1800,785) 1800,835 1830,865 v1@2205,865 ; 2300,891.86 2300,912.32 2299.7,912.63 2299.7,984.7 2320,1005 ; 2301.86,890 U4.5@2325,890 ; v1(2315,1150) 2315,1005 2320,1005 ; U4.5 2373.5,890 v1@2383.52,879.99 ; C13.1 2320,1005
  BOTTOM w7: v1(2215,1155) v1@2217.5,1152.5 ; v1@2312.5,1152.5 v1@2315,1155
  BOTTOM w10: v1(1080,1460) 1270,1460 1285,1475 1285,1550 v1@1290,1555 ; v1(1140,255) 1215,255 1225,265 v1@1225,340 ; v1(1155,1785) 1185,1755 1185,1570 1200,1555 v1(1285,1555) ; v1(1540,1775) 1645,1775 1670,1800 1670,1930 1685,1945 1955,1945 v1@1960,1940 ; v1@2217.5,1152.5 v1@2312.5,1152.5 ; v1(2235,1565) 2235,1635 2250,1650 2480,1650 2485,1655 2485,1735 2495,1745 2785,1745 2795,1735 v1(2795,1470) 2798.36,1466.64 2808,1466.64 2809.64,1465 3030,1465 3055,1490 v1(3055,1750) ; 2377.74,862.74 v1(2390,875) ; v1(2600,500) 2602.5,502.5 2602.5,592.5 v1(2605,595) ; v1(3050,1900) 3050,1975 3090,2015 v1(3205,2015)
  BOTTOM w19: v1(1365,385) 1760,385 1800,425 v1(1800,785) ; v1(2212.14,862.74) 2377.74,862.74
  other v1: 2485,1650 1315.52,1921.3
pads on no net: P2.6 P2.8 SW1.2 SW1.4 U1.2 U1.3 U1.4 U1.14 U1.15 U1.16 U1.17 U1.21 U1.22 U1.24 U1.25 U1.29 U1.30 U1.33 U1.37 U1.38 U1.44 U1.45 U1.50 U1.51 U1.52 U1.53 U1.55 U1.56 U1.57 U2.5 U2.7 U2.8 U2.21 U2.25 U3.6 U4.6 U5.6 U6.5 U8.4 U8.6 U10.6
copper on no net:
  other v1: 1280,160 940,230 1470,1215 1360,1240 1495,1630 2335,2115
  other v2: -1805,1245

## Polygon pours and split planes (outlines as drawn)
DGND on TOP "DGND_L01_P053" (solid, pour order 53): 31.49,95 111.53,14.96 4052.73,15.04 4141.49,103.8 4141.49,2136.18 4082.67,2195 86.37,2195 31.49,2139.9
PGND on TOP "PGND_L01_P048" (solid, pour order 48): 2845,325 2845,345 2795,395 2795,455 2895,455 2895,400 2935,360 2935,325
PGND on TOP "PGND_L01_P047" (solid, pour order 47): 2905,935 2905,995 2980,995 2980,990 2980,935
PGND on TOP "PGND_L01_P045" (solid, pour order 45): 2845,1692.5 2845,1755 2915,1755 2915,1687.5
DCBUS on TOP "DCBUS_L01_P043" (solid, pour order 43): 3465,1250 3475,1240 3790,1240 3800,1250 3800,1350 3785,1365 3465,1365
PGND on TOP "PGND_L01_P041" (solid, pour order 41): 2905,265 2940,230 2940,125 3015,125 3015,260 2950,325 2905,325
SHA on TOP "SHA_L01_P019" (solid, pour order 19): 3090,638.51 4155,638.51 4155,463.51 3855,463.51 3815,423.51 3815,153.51 3765,103.51 3330,103.51 3330,443.51 3305,468.51 3105,468.51 3090,483.51
VCC on TOP "VCC_L01_P015" (solid, pour order 15): 1110,330 1380,330 1395,345 1395,395 1385,405 1120,405 1110,395
12 on TOP "12_L01_P036" (solid, pour order 36): 1720,665 1775,665 1775,610 1720,610
SHC on TOP "SHC_L01_P035" (solid, pour order 35): 3045,1635 3050,1640 3085,1640 3085,1685 3090,1690 3090,1735 3075,1735 3000,1660 3000,1565 3085,1480 3085,1405 3125,1405 3125,1575 3110,1590 3045,1590
SHA on TOP "SHA_L01_P034" (solid, pour order 34): 3100,380 3055,335 3055,290 3070,275 3120,275 3120,135 3115,130 3080,130 3080,200 3020,260 3020,350 3095,425 3100,425
SHB on TOP "SHB_L01_P033" (solid, pour order 33): 3055,915 3075,895 3115,895 3120,890 3120,740 3080,740 3080,835 3015,900 3015,995 3085,1065 3100,1065 3100,990 3070,990 3055,975
SHC on TOP "SHC_L01_P031" (solid, pour order 31): 3075,1830 3075,1640 3140,1640 3145,1645 3145,1820
Net*3_2 on TOP "NET*3_2_L01_P030" (solid, pour order 30): 3135,1790 3135,1730 3140,1725 3190,1725 3190,1660 3195,1655 3285,1655 3285,1785 3280,1790
SHB on TOP "SHB_L01_P029" (solid, pour order 29): 3085,1150.38 3085,995 3090,990 3130,990 3150,1010 3150,1160.38
Net*2_2 on TOP "NET*2_2_L01_P027" (solid, pour order 27): 3200,1000 3200,1065 3195,1070 3155,1070 3155,1120 3160,1125 3330,1125 3330,1010 3320,1000
Net*1_2 on TOP "NET*1_2_L01_P024" (solid, pour order 24): 3150,495 3150,375 3330,375 3330,495
SHA on TOP "SHA_L01_P028" (solid, pour order 28): 3090,470 3090,370 3145,370 3150,375 3150,470
SHB on TOP "SHB_L01_P020" (solid, pour order 20): 3085,1230 4155,1230 4155,1060 3860,1060 3810,1010 3810,730 3780,700 3340,700 3340,1125 3105,1125 3085,1145
Net*2_2 on TOP "NET*2_2_L01_P026" (solid, pour order 26): 3150,830 3155,825 3190,825 3195,820 3195,730 3250,730 3270,750 3270,890 3155,890 3150,885
Net*1_2 on TOP "NET*1_2_L01_P025" (solid, pour order 25): 3200,150 3195,155 3195,205 3180,220 3155,220 3155,270 3160,275 3255,275 3255,150
Net*3_2 on TOP "NET*3_2_L01_P023" (solid, pour order 23): 3140,1570 3135,1565 3135,1395 3230,1395 3260,1425 3260,1570
12 on TOP "12_L01_P022" (solid, pour order 22): 1770,665 1965,665 1965,615 1960,610 1770,610
12 on TOP "12_L01_P013" (solid, pour order 13): 1520,825 1520,925 1530,935 1590,935 1610,955 1610,1025 1595,1040 1530,1040 1515,1055 1515,1175 1530,1190 1700,1190 1730,1160 1730,520 1715,505 1665,505 1665,120 1645,100 1545,100 1520,125 1520,625 1595,700 1595,810 1535,810
SHC on TOP "SHC_L01_P021" (solid, pour order 21): 3075.41,1905.41 4155,1905.41 4155,1715.41 3875.41,1715.41 3805.41,1645.41 3805.41,1430.41 3780.41,1405.41 3325.41,1405.41 3325.41,1769.59 3305,1790 3100,1790 3075.41,1814.59
Net*3_2 on TOP "NET*3_2_L01_P018" (solid, pour order 18): 2850,1510 2850,1340 2862.5,1327.5 3292.5,1327.5 3325,1360 3325,1780 3260,1780 3260,1425 3232.5,1397.5 2915,1397.5 2915,1510
Net*2_2 on TOP "NET*2_2_L01_P017" (solid, pour order 17): 2840,805 2840,672.5 2850,662.5 3297.5,662.5 3330,695 3330,1120 3255,1120 3255,760 3227.5,732.5 2910,732.5 2910,805
Net*1_2 on TOP "NET*1_2_L01_P016" (solid, pour order 16): 2840,130 2840,52.5 2850,42.5 3297.5,42.5 3330,75 3330,495 3255,495 3255,140 3227.5,112.5 2910,112.5 2910,130
5V on TOP "5V_L01_P014" (solid, pour order 14): 1020,345 1095,345 1095,475 1061.98,508.02 1061.98,380 1020,380
NetR37_1 on TOP "NETR37_1_L01_P012" (solid, pour order 12): 1380,850 1500,850 1510,860 1510,1025 1470,1025 1460,1015 1460,900 1447.55,887.55 1377.55,887.55 1370,880 1370,860
NetD4_A on TOP "NETD4_A_L01_P011" (solid, pour order 11): 1325,810 1325,555 1335,545 1500,545 1520,565 1520,660 1535,675 1590,675 1590,805 1585,810
NetL2_1 on TOP "NETL2_1_L01_P010" (solid, pour order 10): 1330,745 1315,730 1235,730 1215,710 1215,550 1095,550 1095,760 1140,805 1310,805 1330,785
5V on TOP "5V_L01_P009" (solid, pour order 9): 890,560 890,440 920,410 1060,410 1070,420 1070,500 1010,560
5V on TOP "5V_L01_P008" (solid, pour order 8): 1300,1105 1290,1095 1290,915 1265,890 920,890 890,860 890,560 1010,560 1010,785 1035,810 1320,810 1340,830 1340,1095 1330,1105
NetC25_1 on TOP "NETC25_1_L01_P007" (solid, pour order 7): 705,560 795,560 805,570 805,1030 785,1050 720,1050 705,1035
PGND on TOP "PGND_L01_P002" (solid, pour order 2): 460,290 460,135 525,135 530,130 530,290
Net*7_1 on TOP "NET*7_1_L01_P001" (solid, pour order 1): 557.5,492.5 587.5,462.5 587.5,392.5 560,365 90,365 65,390 65,673.89 86.25,697.5 385,697.5 385,530 422.5,492.5
NetD5_K on TOP "t" (solid, pour order 0): 60,1795 60,1620 60,745 80,725 365,725 385,745 385,1375 340,1420 245,1420 215,1450 215,1575 295,1655 295,1825 90,1825
DGND on BOTTOM "DGND_L02_P054" (solid, pour order 54): 34.8,2134.2 89.8,2189.2 4089.9,2189.2 4144.8,2134.3 4144.8,98.86 4065.14,19.2 99.8,19.2 34.8,84.2
DCBUS on BOTTOM "DCBUS_L02_P006" (solid, pour order 6): 410,1390 410,1280 425,1265 3465,1265 3485,1285 3485,1390 3470,1405 425,1405
PGND on BOTTOM "PGND_L02_P046" (solid, pour order 46): 2905,935 2905,675 2795,565 2795,395 2895,395 2895,550 2990,645 2990,995 2905,995
PGND on BOTTOM "PGND_L02_P044" (solid, pour order 44): 2930,1880 2845,1795 2845,1700 2915,1695 2915,1775 2965,1825 3395,1825 3475,1905 3580,1905 3600,1885 3600,1815 3610,1805 3710,1805 3710,1930 3670,1970 3415,1970 3325,1880
PGND on BOTTOM "PGND_L02_P042" (solid, pour order 42): 2940,190 2940,50 3010,50 3010,190
PGND on BOTTOM "PGND_L02_P038" (solid, pour order 38): 530,135 530,42.5 560.03,12.47 3444.97,12.47 3445,77.5 630,77.5 605,102.5 605,197.5 570,232.5 460,232.5 460,135
PGND on BOTTOM "PGND_L02_P037" (solid, pour order 37): 3600,1815 3600,95 3580,75 3445,75 3445,10 3685,10 3710,35 3710,1805 3685,1830 3610,1830
DCBUS on BOTTOM "DCBUS_L02_P005" (solid, pour order 5): 3805,95 3785,75 3745,75 3720,100 3720,1805 3720,1845 3740,1865 3790,1865 3805,1850
DCBUS on BOTTOM "DCBUS_L02_P004" (solid, pour order 4): 3490,1865 3455,1830 3455,110 3475,90 3570,90 3590,110 3590,1840 3565,1865

## Silkscreen, mask and mechanical layers (free items; w line width, h text height)
Top Overlay:
  text "RX" at 665,2135 h40
  text "TX" at 781.27,2134.54 h40
  text "DGND" at 895,2135 h40
  text "VCC" at 1065,2135 h40
  text "CAN" at 1935,2050 h60
  text "ENCODER" at 3130,1910 h60
  text "ON" at 290,1875 h60
  text "OFF" at 455,1875 h60
  text "RST" at 676.27,1864.54 h40
  text "CLK" at 965,1860 h40
  text "DIO" at 1091.27,1859.54 h40
  text "C" at 4025,1590 h120 r90
  text "B" at 4025,935 h120 r90
  text "A" at 4025,340 h120 r90
Top Solder:
  rectangle: 3855,465 4155,640
  rectangle: 3860,1060 4155,1230
  rectangle: 3875,1715 4155,1905
Mechanical 1:
  lines w10: 20,96.95 20,2095 cw(c125.46,2104.06) 94.88,2205.4 ; 21.1,95.85 ccw(c125.94,110.46) 135,5 4075.07,5 ; 94.88,2205.46 4045.94,2205.46 cw(c4055,2100) 4159.83,2114.61 ; 4075.07,6.07 ccw(c4055,110) 4160.46,119.06 4160.46,2110.71
Mechanical 9:
  lines w10: 4140,0 4165,0